# Altium PCB DC-DC Converter.PcbDoc (part 3 of 3)
Units mil, origin at the board's own origin, x right, y up, seen from the top; angles counter-clockwise.
Board outline 6692.91 x 3543.31 mil, 4 copper layers (Top Layer, GND, Power, Bottom Layer), stack 23.756 mil thick; 100 components, 76 nets, 345 pads, 803 vias.
Unrouted connection lines stored in the file: 1.
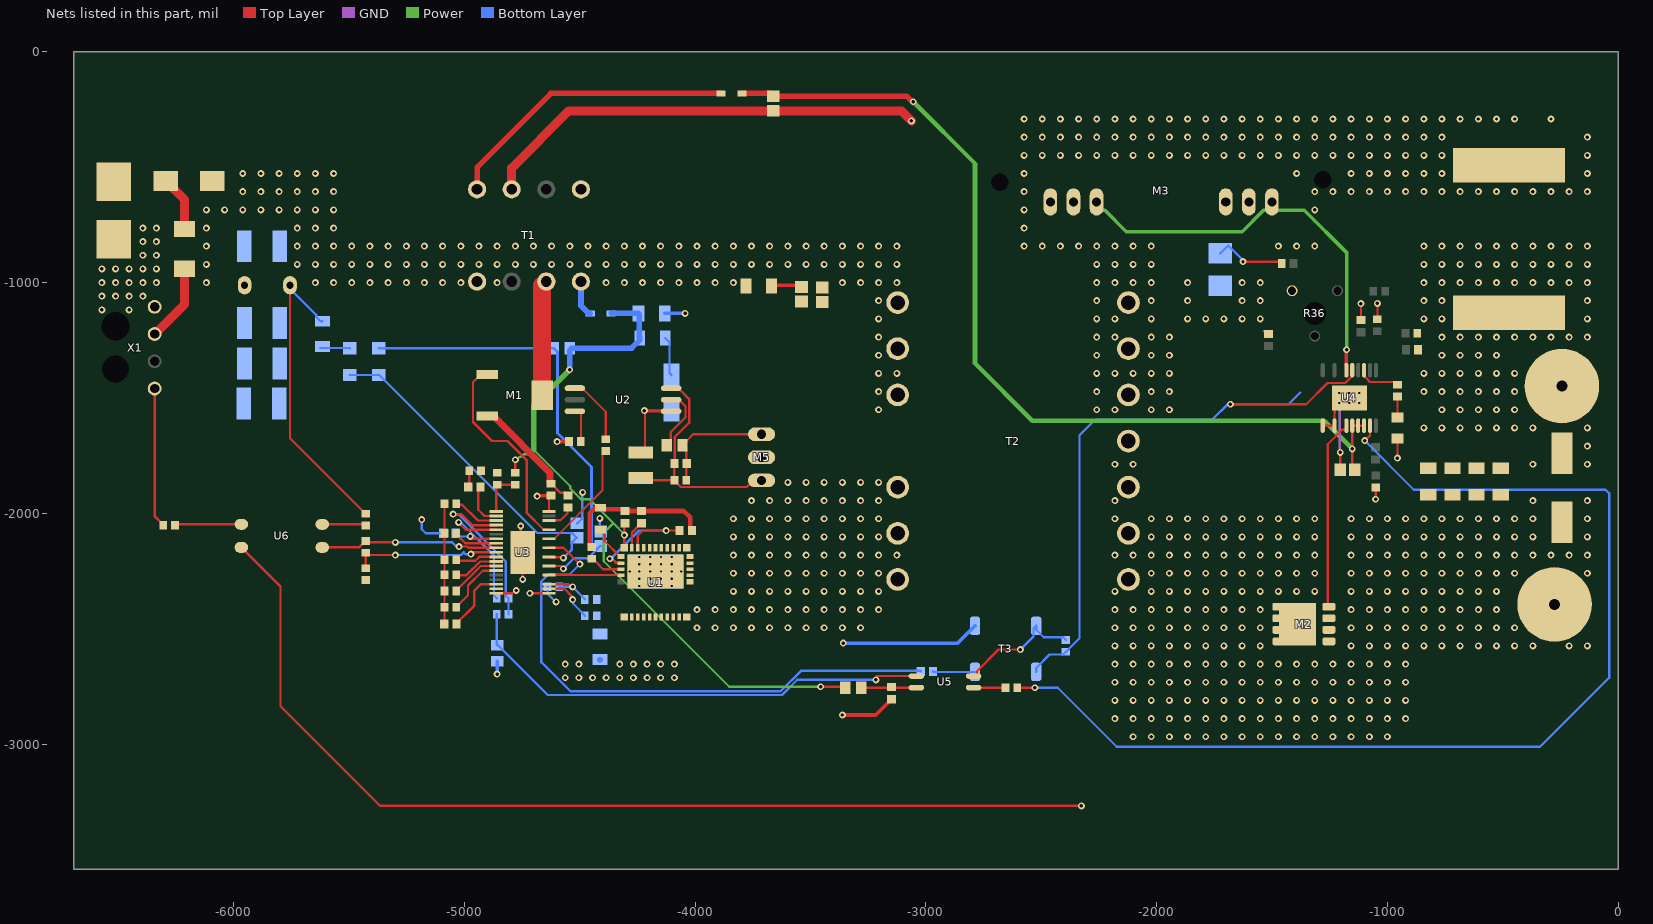
[diagram p4: the nets of this part, all layers, seen from the top]

## Via types
v1: diameter 30, hole 15, Top Layer to Bottom Layer, 791 vias
v2: diameter 19.68, hole 10, Top Layer to Bottom Layer, 6 vias
v3: diameter 196.85, hole 196.85, Top Layer to Bottom Layer, 4 vias
v4: diameter 47.24, hole 47.24, Top Layer to Bottom Layer, 2 vias

## Nets (pads, with @x,y where several pads share a name; then routed paths per layer and width w, separated by ;. In a path a pad name is that pad's centre, name@x,y a point inside that pad or via, vN(x,y) a via of type N, cw(c..) or ccw(c..) an arc to the next point about the centre after c; other vN are vias at no path point) (continued)
+12V_HC_HV: C2.2 C10.2 D2.1 R6.2 R11.1 R16.1 R41.2 U1.27 | length 3320.8
  Top Layer w10: R11.1@-4779.53,-1824.8 v1(-4779.53,-1767.8) ; U1.27@-4307.72,-2149.76 -4307.09,-2149.12 -4307.09,-2047.08 C10.2@-4303.32,-2043.31 ; v1(-3456.69,-2751.55) -3353.35,-2751.55 R41.2@-3349.41,-2755.48
  Power w10: v1(-4779.53,-1767.8) -4774.12,-1767.8 -4762.16,-1755.85 -4755.76,-1755.85 -4744.11,-1744.19 -4719.58,-1744.19 -4699.8,-1724.41 -4541.87,-1882.34 -4541.87,-1892.54 -4495.01,-1939.4 -4458.24,-1939.4 -4354.33,-2043.31 -4307.09,-2090.55 v1(-4307.09,-2094.49) ; -4357.76,-2046.73 -4396.07,-2085.05 -4396.07,-2207.62 -3852.14,-2751.55 v1(-3456.69,-2751.55)
  Power w23.62: -4699.8,-1724.41 -4699.8,-1533.46 v1(-4544.29,-1377.95)
  Bottom Layer w23.62: v1(-4544.29,-1377.95) -4544.29,-1294.29 -4534.45,-1284.45 -4275.59,-1284.45 -4240.16,-1249.02 R6.2@-4240.16,-1240.16 -4243.11,-1237.2 -4243.11,-1136.81 C2.2@-4246.06,-1133.86 D2.1@-4364.17,-1133.86
+12V_HC_LV: C1.2 C21.2 D1.1 U4.6 U4.7 U4.8 | length 4042.2
  Top Layer w10: C21.2@-1141.73,-1811.02 -1152.56,-1800.2 v1(-1152.56,-1720.47) U4.6@-1152.56,-1620.08 U4.7@-1126.97,-1620.08 U4.8@-1101.38,-1620.08
  Top Layer w23.62: D1.1@-3797.24,-180.31 -3674.02,-180.31 C1.2@-3661.42,-192.91 -3082.68,-192.91 -3055.12,-220.47 v1(-3055.12,-216.54)
  Power w19.68: v1(-3055.12,-216.54) -2787.4,-484.25 -2787.4,-1350.39 -2539.37,-1598.43 -1274.61,-1598.43 v1(-1152.56,-1720.47)
+14V_OUT: C5.1 C6.2 C7.2 C8.2 C9.2 C20.2 L2.2@-472.44,-1130.81 R34.2 X2.1
  other v1: -370.07,-1787.4 -133.85,-1787.4 -133.85,-1708.66 -842.52,-1629.92 -763.78,-1629.92 -685.04,-1629.92 -606.3,-1629.92 -527.56,-1629.92 -448.82,-1629.92 -370.07,-1629.92 -133.85,-1629.92 -763.78,-1551.18 -685.04,-1551.18 -606.3,-1551.18 -527.56,-1551.18 -448.82,-1551.18 -842.52,-1472.44 -763.78,-1472.44 -685.04,-1472.44 -606.3,-1472.44 -527.56,-1472.44 -448.82,-1472.44 -842.52,-1393.7 -763.78,-1393.7 -685.04,-1393.7 -606.3,-1393.7 -527.56,-1393.7 -448.82,-1393.7 -763.78,-1314.96 -685.04,-1314.96 -606.3,-1314.96 -527.56,-1314.96 -763.78,-1236.22 -685.04,-1236.22 -606.3,-1236.22 -527.56,-1236.22 -448.82,-1236.22 -370.07,-1236.22 -291.33,-1236.22 -212.59,-1236.22 -133.85,-1236.22 -842.52,-1157.48 -763.78,-1157.48 -133.85,-1157.48 -842.52,-1078.74 -763.78,-1078.74 -133.85,-1078.74 -842.52,-1000 -763.78,-1000 -685.04,-1000 -606.3,-1000 -527.56,-1000 -448.82,-1000 -370.07,-1000 -291.33,-1000 -212.59,-1000 -133.85,-1000 -842.52,-921.26 -763.78,-921.26 -685.04,-921.26 -606.3,-921.26 -527.56,-921.26 -448.82,-921.26 -370.07,-921.26 -291.33,-921.26 -212.59,-921.26 -133.85,-921.26 -842.52,-842.52 -763.78,-842.52 -685.04,-842.52 -606.3,-842.52 -527.56,-842.52 -448.82,-842.52 -370.07,-842.52 -291.33,-842.52 -212.59,-842.52 -133.85,-842.52
  other v4: -244.09,-1448.57
AGND: C18.1 C19.1 R12.1 R13.2 R24.1 R26.1 R27.1 R28.1 R29.1 R30.1 R31.1 U3.18 | length 663.1
  Top Layer w10: C19.1@-5087.6,-2478.85 -5086.61,-2477.86 R28.1@-5086.61,-2407.82 R31.1@-5086.61,-2336.78 R30.1@-5086.61,-2265.75 R29.1@-5086.61,-2200.79 R27.1@-5086.61,-2086.61 R26.1@-5086.61,-1958.33
  Bottom Layer w10: v1(-5185.11,-2027.56) -5185.11,-2068.72 -5167.21,-2086.61 C18.1@-5091.54,-2086.61
Aux_Pri_Dot: M1.2 T1.3 | length 499.6
  Top Layer w78.74: M1.2@-4663.28,-1488.19 -4663.28,-1014.07 T1.3@-4645.28,-996.06
Aux_Sec_HV_Dot: D2.2 T1.4 | length 158.6
  Bottom Layer w25: T1.4@-4495.28,-996.06 -4495.28,-1100.2 -4461.61,-1133.86 D2.2@-4454.72,-1133.86
Aux_Sec_LV__Dot: D1.2 T1.8 | length 1285.7
  Top Layer w23.62: T1.8@-4945.28,-596.06 -4945.28,-500.39 -4625.2,-180.31 D1.2@-3887.8,-180.31
BBSW: L2.2@-4410.43,-2070.87 U1.28 | length 159.5
  Top Layer w10: L2.2@-4410.43,-2070.87 -4403.54,-2070.87 -4391.81,-2082.6 -4391.81,-2120.79 -4325.42,-2187.18 U1.28@-4321.5,-2187.17
Cch_Drain_CSW: L2.1@-472.44,-491.24 M3.2 M3.5 T2.11 T2.12 T2.13
  other v1: -2259.84,-1551.18 -2181.1,-1551.18 -2023.62,-1551.18 -1944.88,-1551.18 -2259.84,-1472.44 -2023.62,-1472.44 -1944.88,-1472.44 -2259.84,-1393.7 -2181.1,-1393.7 -2102.36,-1393.7 -2023.62,-1393.7 -1944.88,-1393.7 -2259.84,-1314.96 -2023.62,-1314.96 -1944.88,-1314.96 -2259.84,-1236.22 -2181.1,-1236.22 -2023.62,-1236.22 -1944.88,-1236.22 -2259.84,-1157.48 -2181.1,-1157.48 -2023.62,-1157.48 -2259.84,-1078.74 -2023.62,-1078.74 -2259.84,-1000 -2181.1,-1000 -2102.36,-1000 -2023.62,-1000 -2259.84,-921.26 -2181.1,-921.26 -2102.36,-921.26 -2023.62,-921.26 -2574.8,-842.52 -2496.06,-842.52 -2417.32,-842.52 -2338.58,-842.52 -2259.84,-842.52 -2181.1,-842.52 -2102.36,-842.52 -2023.62,-842.52 -1472.44,-842.52 -1393.7,-842.52 -1314.96,-842.52 -2574.8,-763.78 -2574.8,-685.04 -1314.96,-685.04 -2574.8,-606.3 -1314.96,-606.3 -1236.22,-606.3 -1157.48,-606.3 -1078.74,-606.3 -1000,-606.3 -921.26,-606.3 -842.52,-606.3 -763.78,-606.3 -685.04,-606.3 -606.3,-606.3 -527.56,-606.3 -448.82,-606.3 -370.07,-606.3 -291.33,-606.3 -212.59,-606.3 -133.85,-606.3 -2574.8,-527.56 -1393.7,-527.56 -1157.48,-527.56 -1078.74,-527.56 -1000,-527.56 -921.26,-527.56 -842.52,-527.56 -763.78,-527.56 -133.85,-527.56 -2574.8,-448.82 -2496.06,-448.82 -2417.32,-448.82 -2338.58,-448.82 -2259.84,-448.82 -2181.1,-448.82 -2102.36,-448.82 -2023.62,-448.82 -1944.88,-448.82 -1866.14,-448.82 -1787.4,-448.82 -1708.66,-448.82 -1629.92,-448.82 -1551.18,-448.82 -1472.44,-448.82 -1393.7,-448.82 -1314.96,-448.82 -1236.22,-448.82 -1157.48,-448.82 -1078.74,-448.82 -1000,-448.82 -921.26,-448.82 -842.52,-448.82 -763.78,-448.82 -133.85,-448.82 -2574.8,-370.08 -2496.06,-370.08 -2417.32,-370.08 -2338.58,-370.08 -2259.84,-370.08 -2181.1,-370.08 -2102.36,-370.08 -2023.62,-370.08 -1944.88,-370.08 -1866.14,-370.08 -1787.4,-370.08 -1708.66,-370.08 -1629.92,-370.08 -1551.18,-370.08 -1472.44,-370.08 -1393.7,-370.08 -1314.96,-370.08 -1236.22,-370.08 -1157.48,-370.08 -1078.74,-370.08 -1000,-370.08 -921.26,-370.08 -842.52,-370.08 -763.78,-370.08 -133.85,-370.08 -2574.8,-291.34 -2496.06,-291.34 -2417.32,-291.34 -2338.58,-291.34 -2259.84,-291.34 -2181.1,-291.34 -2102.36,-291.34 -2023.62,-291.34 -1944.88,-291.34 -1866.14,-291.34 -1787.4,-291.34 -1708.66,-291.34 -1629.92,-291.34 -1551.18,-291.34 -1472.44,-291.34 -1393.7,-291.34 -1314.96,-291.34 -1236.22,-291.34 -1157.48,-291.34 -1078.74,-291.34 -1000,-291.34 -921.26,-291.34 -842.52,-291.34 -763.78,-291.34 -685.04,-291.34 -606.3,-291.34 -527.56,-291.34 -448.82,-291.34 -291.33,-291.34
Cch_Drive: M3.1 M3.4 U4.16 | length 1783
  Top Layer w15.75: U4.16@-1178.23,-1360.24 v1@-1178.23,-1292.4
  Top Layer w23.62: v1@-1178.23,-1292.4 v1(-1177.17,-1291.34)
  Power w15.75: M3.4@-2260.79,-650.61 -2260.79,-667.16 -2240.78,-687.16 -2224.48,-687.16 -2132.12,-779.53 -1629.46,-779.53 -1537.09,-687.16 -1517.16,-687.16 M3.1@-1500.79,-670.8 ; M3.1@-1500.79,-650.61 -1500.79,-667.16 -1480.78,-687.16 -1360.08,-687.16 -1177.17,-870.08 v1(-1177.17,-1291.34)
Cch_Gate: C13.2 M5.1 R7.2 R8.2 | length 530.2
  Top Layer w10: R7.2@-4056.1,-1716.54 R7.2@-4056.1,-1712.6 ; R8.2@-4038.96,-1856.3 -4038.96,-1786 C13.2@-4036.42,-1783.46 -4038.46,-1781.42 -4038.46,-1722.19 -4056.1,-1704.56 -4056.1,-1700.62 -4038.46,-1682.98 -4034.53,-1682.98 -4009.03,-1657.48 M5.1@-3712.6,-1657.48
Cch_I_Sense: M3.3 M3.6 R3.2 R33.2 | length 315.6
  Top Layer w10: v1(-1625.98,-909.45) -1466.54,-909.45 R33.2@-1458.66,-917.32
  Bottom Layer w10: R3.2@-1724.41,-873.62 -1690.19,-839.4 -1625.98,-903.6 v1(-1625.98,-909.45)
Clp_Drain: C3.1 C4.1 M5.2
Clp_Gate: R9.1 U3.32 | length 496.3
  Top Layer w10: U3.32@-4633.86,-2110.24 -4611.22,-2110.24 -4401.5,-1900.51 -4401.5,-1742.05 -4389.76,-1730.32 R9.1@-4387.8,-1730.32
Comp: R22.1 U3.5 | length 579.9
  Top Layer w10: v1(-5025.59,-2039.37) -4994.09,-2070.87 U3.5@-4862.2,-2070.87
  Bottom Layer w10: v1(-5025.59,-2039.37) -5021.76,-2043.2 -5012,-2043.2 -4871.97,-2183.23 -4871.97,-2356.88 R22.1@-4860.24,-2368.61
CPC_CTRL+: R38.1 U6.1 | length 288.8
  Top Layer w10: R38.1@-6253.94,-2051.18 -6250.53,-2047.77 U6.1@-5966.54,-2047.77
FB: R22.2 R23.1 U3.4 | length 753.9
  Top Layer w10: v1(-5049.21,-2003.94) -5013,-2003.94 -4965.76,-2051.18 U3.4@-4862.2,-2051.18
  Bottom Layer w10: v1(-5049.21,-2003.94) -5045.39,-2007.76 -5021.84,-2007.76 -4820.79,-2208.82 -4820.79,-2356.88 R22.2@-4809.06,-2368.61 R23.1@-4809.06,-2437.99
Fwd_Drain_FSW: M2.5 M2.6 M2.7 M2.8 T2.7 T2.8 T2.9 T2.10
  other v1: -2102.36,-2968.5 -2023.62,-2968.5 -1944.88,-2968.5 -1866.14,-2968.5 -1787.4,-2968.5 -1708.66,-2968.5 -1629.92,-2968.5 -1551.18,-2968.5 -1472.44,-2968.5 -1393.7,-2968.5 -1314.96,-2968.5 -2181.1,-2889.76 -2102.36,-2889.76 -2023.62,-2889.76 -1944.88,-2889.76 -1866.14,-2889.76 -1787.4,-2889.76 -1708.66,-2889.76 -1629.92,-2889.76 -1551.18,-2889.76 -1472.44,-2889.76 -1393.7,-2889.76 -1314.96,-2889.76 -2181.1,-2811.02 -2102.36,-2811.02 -2023.62,-2811.02 -1944.88,-2811.02 -1866.14,-2811.02 -1787.4,-2811.02 -1708.66,-2811.02 -1629.92,-2811.02 -1551.18,-2811.02 -1472.44,-2811.02 -1393.7,-2811.02 -1314.96,-2811.02 -2181.1,-2732.28 -2102.36,-2732.28 -2023.62,-2732.28 -1944.88,-2732.28 -1866.14,-2732.28 -1787.4,-2732.28 -1708.66,-2732.28 -1629.92,-2732.28 -1551.18,-2732.28 -1472.44,-2732.28 -1393.7,-2732.28 -1314.96,-2732.28 -2181.1,-2653.54 -2102.36,-2653.54 -2023.62,-2653.54 -1944.88,-2653.54 -1866.14,-2653.54 -1787.4,-2653.54 -1708.66,-2653.54 -1629.92,-2653.54 -1551.18,-2653.54 -1472.44,-2653.54 -1393.7,-2653.54 -1314.96,-2653.54 -2181.1,-2574.8 -2102.36,-2574.8 -2023.62,-2574.8 -1944.88,-2574.8 -1866.14,-2574.8 -1787.4,-2574.8 -1708.66,-2574.8 -1629.92,-2574.8 -1551.18,-2574.8 -2181.1,-2496.06 -2102.36,-2496.06 -2023.62,-2496.06 -1944.88,-2496.06 -1866.14,-2496.06 -1787.4,-2496.06 -1708.66,-2496.06 -1629.92,-2496.06 -1551.18,-2496.06 -2181.1,-2417.32 -2102.36,-2417.32 -2023.62,-2417.32 -1944.88,-2417.32 -1866.14,-2417.32 -1787.4,-2417.32 -1708.66,-2417.32 -1629.92,-2417.32 -1551.18,-2417.32 -2181.1,-2338.58 -2023.62,-2338.58 -1944.88,-2338.58 -1866.14,-2338.58 -1787.4,-2338.58 -1708.66,-2338.58 -1629.92,-2338.58 -1551.18,-2338.58 -1472.44,-2338.58 -1393.7,-2338.58 -1314.96,-2338.58 -2023.62,-2259.84 -1944.88,-2259.84 -1866.14,-2259.84 -1787.4,-2259.84 -1708.66,-2259.84 -1629.92,-2259.84 -1551.18,-2259.84 -1472.44,-2259.84 -1393.7,-2259.84 -1314.96,-2259.84 -2181.1,-2181.1 -2102.36,-2181.1 -2023.62,-2181.1 -1944.88,-2181.1 -1866.14,-2181.1 -1787.4,-2181.1 -1708.66,-2181.1 -1629.92,-2181.1 -1551.18,-2181.1 -1472.44,-2181.1 -1393.7,-2181.1 -1314.96,-2181.1 -2023.62,-2102.36 -1944.88,-2102.36 -1866.14,-2102.36 -1787.4,-2102.36 -1708.66,-2102.36 -1629.92,-2102.36 -1551.18,-2102.36 -1472.44,-2102.36 -1393.7,-2102.36 -1314.96,-2102.36 -2181.1,-2023.62 -2023.62,-2023.62 -1944.88,-2023.62 -1866.14,-2023.62 -1787.4,-2023.62 -1708.66,-2023.62 -1629.92,-2023.62 -1551.18,-2023.62 -1472.44,-2023.62 -1393.7,-2023.62 -1314.96,-2023.62 -2181.1,-1944.88 -2181.1,-1787.4 -2102.36,-1787.4
Fwd_Drive: M2.4 U4.5 | length 837.5
  Top Layer w10: M2.4@-1267.93,-2406.47 -1258.61,-2406.47 -1258.61,-1700.54 -1196.15,-1638.08 -1181.71,-1638.08 -1178.15,-1634.51 U4.5@-1178.15,-1620.08
HCOMP: C15.1 U3.2 | length 181.7
  Top Layer w10: C15.1@-4930.29,-1886.76 -4930.29,-1889.88 -4939.88,-1899.48 -4939.88,-1984.58 -4912.97,-2011.5 U3.2@-4871.12,-2011.5
HCOMP_C: C15.2 R13.1 | length 72.7
  Top Layer w10: C15.2@-4983.44,-1886.76 -4983.44,-1886.66 -4979.33,-1882.56 R13.1@-4979.33,-1815.73
HFB: R11.2 R12.2 U3.1 | length 196.5
  Top Layer w10: U3.1@-4862.2,-1992.13 -4862.13,-1992.05 -4862.13,-1879.84 R12.2@-4858.27,-1875.98 R11.2@-4779.53,-1875.98
HISENSE: R14.1 U3.36 | length 121.3
  Top Layer w10: U3.36@-4633.86,-2031.5 -4632.95,-2030.59 -4583.83,-2030.59 -4553.15,-1999.91 -4553.15,-1974.41 R14.1@-4551.18,-1974.41
HV+: F1.1 X1.1
  other v1: -6570.87,-1118.11 -6452.76,-1118.11 -6570.87,-1059.06 -6511.81,-1059.06 -6452.76,-1059.06 -6393.7,-1059.06 -6570.87,-1000 -6511.81,-1000 -6452.76,-1000 -6393.7,-1000 -6334.65,-1000 -6570.87,-940.95 -6511.81,-940.95 -6452.76,-940.95 -6393.7,-940.95 -6334.65,-940.95 -6393.7,-881.89 -6334.65,-881.89 -6393.7,-822.84 -6334.65,-822.84 -6393.7,-763.78 -6334.65,-763.78
HV_IN: C3.2 C26.1 C27.2 C28.2 C29.2 C30.2 L1.2 R2.2 R15.2 R17.1 T1.1 T2.1 T2.2 T2.3 | length 1346.9
  Top Layer w10: C26.1@-5755.91,-1011.81 -5755.91,-1675.12 -5429.13,-2001.89 R17.1@-5427.17,-2001.89
  Bottom Layer w10: C26.1@-5755.91,-1011.81 -5752.35,-1015.37 -5752.35,-1030.33 -5642.44,-1140.24 -5642.44,-1149.09 -5623.82,-1167.72 R15.2@-5614.96,-1167.72
  other v1: -3204.72,-1551.18 -3204.72,-1472.44 -3204.72,-1393.7 -3125.98,-1393.7 -3204.72,-1314.96 -3204.72,-1236.22 -3204.72,-1157.48 -3204.72,-1078.74 -6118.11,-1000 -5645.67,-1000 -5566.93,-1000 -5488.19,-1000 -5409.45,-1000 -5330.71,-1000 -5251.97,-1000 -5173.23,-1000 -5094.49,-1000 -5015.75,-1000 -4858.27,-1000 -4385.83,-1000 -4307.08,-1000 -4228.34,-1000 -4149.6,-1000 -4070.86,-1000 -3992.12,-1000 -3913.38,-1000 -3834.64,-1000 -3362.2,-1000 -3283.46,-1000 -3204.72,-1000 -3125.98,-1000 -6118.11,-921.26 -5724.41,-921.26 -5645.67,-921.26 -5566.93,-921.26 -5488.19,-921.26 -5409.45,-921.26 -5330.71,-921.26 -5251.97,-921.26 -5173.23,-921.26 -5094.49,-921.26 -5015.75,-921.26 -4937.01,-921.26 -4858.27,-921.26 -4779.53,-921.26 -4700.79,-921.26 -4622.05,-921.26 -4543.31,-921.26 -4464.57,-921.26 -4385.83,-921.26 -4307.08,-921.26 -4228.34,-921.26 -4149.6,-921.26 -4070.86,-921.26 -3992.12,-921.26 -3913.38,-921.26 -3834.64,-921.26 -3755.9,-921.26 -3677.16,-921.26 -3598.42,-921.26 -3519.68,-921.26 -3440.94,-921.26 -3362.2,-921.26 -3283.46,-921.26 -3204.72,-921.26 -3125.98,-921.26 -6118.11,-842.52 -5724.41,-842.52 -5645.67,-842.52 -5566.93,-842.52 -5488.19,-842.52 -5409.45,-842.52 -5330.71,-842.52 -5251.97,-842.52 -5173.23,-842.52 -5094.49,-842.52 -5015.75,-842.52 -4937.01,-842.52 -4858.27,-842.52 -4779.53,-842.52 -4700.79,-842.52 -4622.05,-842.52 -4543.31,-842.52 -4464.57,-842.52 -4385.83,-842.52 -4307.08,-842.52 -4228.34,-842.52 -4149.6,-842.52 -4070.86,-842.52 -3992.12,-842.52 -3913.38,-842.52 -3834.64,-842.52 -3755.9,-842.52 -3677.16,-842.52 -3598.42,-842.52 -3519.68,-842.52 -3440.94,-842.52 -3362.2,-842.52 -3283.46,-842.52 -3204.72,-842.52 -3125.98,-842.52 -6118.11,-763.78 -5724.41,-763.78 -5645.67,-763.78 -5566.93,-763.78 -6118.11,-685.04 -6039.37,-685.04 -5960.63,-685.04 -5881.89,-685.04 -5803.15,-685.04 -5724.41,-685.04 -5645.67,-685.04 -5566.93,-685.04 -5960.63,-606.3 -5881.89,-606.3 -5803.15,-606.3 -5724.41,-606.3 -5645.67,-606.3 -5566.93,-606.3 -5960.63,-527.56 -5881.89,-527.56 -5803.15,-527.56 -5724.41,-527.56 -5645.67,-527.56 -5566.93,-527.56
HV_IN_R: R17.2 U6.4 | length 191.2
  Top Layer w10: U6.4@-5616.14,-2047.77 -5432.46,-2047.77 R17.2@-5427.17,-2053.07
HVGND: C2.1 C16.1 C17.1 C24.1 C26.2 C27.1 C28.1 C29.1 C30.1 D7.1 R1.1 R5.1 R10.1 R19.1 R25.1 T1.5 T3.3 U3.19 U3.20 U3.38 U3.39 X1.2 | length 2213.4
  Top Layer w10: U3.19@-4862.2,-2346.46 -4791.45,-2346.46 -4779.64,-2334.65 v1(-4775.59,-2334.65) ; v1(-4755.91,-2055.12) -4755.91,-2161.41 U3.39@-4748.03,-2169.29 -4748.03,-2286.05 v1(-4747.32,-2286.76) ; v1@-4716.54,-2346.46 U3.20@-4633.86,-2346.46 ; R1.1@-4633.86,-1931.8 U3.38@-4633.86,-1992.13 U3.38@-4632.95,-1991.22
  Top Layer w15.75: v1(-4685.04,-1925.2) -4683.91,-1924.07 -4626.13,-1924.07 R1.1@-4633.86,-1931.8 ; v1(-4598.43,-1688.98) R10.1@-4546.97,-1688.98 ; v1(-3362.2,-2874.02) -3217.52,-2874.02 C24.1@-3149.61,-2806.1
  Top Layer w39.37: X1.2@-6342.52,-1223.23 -6212.6,-1093.31 D7.1@-6212.6,-940.04
  Bottom Layer w10: R19.1@-4639.76,-2318.9 -4639.76,-2348.43 -4604.07,-2384.11 v1(-4602.36,-2384.11) ; C16.1@-4511.81,-2043.31 -4509.84,-2043.31 -4489.25,-2022.72 -4489.25,-1904.85 -4488.19,-1905.91 v1(-4488.19,-1909.45) ; v1(-4413.39,-2021.81) -4413.39,-2074.8 C17.1@-4409.45,-2078.74
  Bottom Layer w15.75: v1(-4858.27,-2696.85) R25.1@-4858.27,-2640.75 ; C2.1@-4131.89,-1133.86 v1(-4043.31,-1133.86) ; v1(-3358.27,-2562.99) -2862.85,-2562.99 T3.3@-2787.4,-2487.54
  Bottom Layer w23.62: R5.1@-4413.39,-2633.86 R5.1@-4411.58,-2633.86
  other v1: -4562.99,-2712.6 -4503.94,-2712.6 -4444.88,-2712.6 -4385.83,-2712.6 -4326.77,-2712.6 -4267.72,-2712.6 -4208.66,-2712.6 -4149.61,-2712.6 -4090.55,-2712.6 -4562.99,-2653.54 -4503.94,-2653.54 -4326.77,-2653.54 -4267.72,-2653.54 -4208.66,-2653.54 -4149.61,-2653.54 -4090.55,-2653.54 -4716.54,-2346.46
INTVCC: C17.2 D6.1 R16.2 U3.26 | length 1981.3
  Top Layer w10: U3.26@-4633.86,-2228.35 -4582.68,-2228.35 v1(-4570.87,-2240.16)
  Bottom Layer w10: v1(-4570.87,-2240.16) -4525.18,-2194.47 -4464.16,-2194.47 -4411.42,-2141.73 C17.2@-4409.45,-2141.73
  Bottom Layer w12: D6.1@-5371.18,-1284.45 R16.2@-4613.19,-1284.45 -4596.55,-1301.09 -4596.55,-1652.67 -4449.01,-1800.21 -4449.01,-2135.25 -4429.13,-2155.13 C17.2@-4429.13,-2161.42
ISENSEP: R20.1 U3.21 | length 240
  Top Layer w10: U3.21@-4633.86,-2326.77 -4566.93,-2326.77 -4531.5,-2362.2 v1(-4531.5,-2374.02)
  Bottom Layer w10: v1(-4531.5,-2374.02) -4531.5,-2367.42 -4528.89,-2364.81 -4528.89,-2392.2 -4478.35,-2442.75 R20.1@-4478.35,-2444.71
IVSEC: R27.2 U3.8 | length 193.4
  Top Layer w10: R27.2@-5035.43,-2086.61 -5023.7,-2098.35 -5023.7,-2102.21 -4996.61,-2129.29 -4862.83,-2129.29 U3.8@-4862.2,-2129.92
LVGND: C1.1 C5.2 C6.1 C7.1 C8.1 C9.1 C21.1 C23.2 D5.2 M2.1 M2.2 M2.3 R3.1 R32.2 R36.2 R39.1 R40.1 R43.1 T1.7 T3.4 U4.1 U4.3 U4.21 U5.2 U6.2 X3.1 | length 7707.4
  Top Layer w10: U6.2@-5966.54,-2147.77 -5797.24,-2317.06 -5797.24,-2836.61 -5366.14,-3267.72 v1(-2326.77,-3267.72) ; U5.2@-2793.47,-2705.48 -2785.31,-2705.48 -2779.02,-2699.19 -2779.02,-2684.53 -2685.04,-2590.55 v1(-2590.56,-2590.55) ; -1536.34,-1211.68 -1527.48,-1211.68 R32.2@-1515.75,-1223.42 ; U4.1@-1280.51,-1620.08 U4.3@-1229.33,-1620.08 -1229.33,-1563.98 -1228.43,-1563.08 -1228.43,-1548.94 -1179.5,-1500 U4.21@-1165.35,-1500 ; C21.1@-1204.72,-1811.02 v1(-1204.72,-1736.22) ; C23.2@-1114.99,-1161.97 v1(-1114.99,-1091.52) ; v1(-1051.35,-1938.98) -1051.18,-1938.98 R40.1@-1051.18,-1887.8 ; R39.1@-1043.96,-1159.45 -1043.31,-1158.8 v1(-1043.31,-1090.55) ; v1(-956.69,-1761.22) D5.2@-956.69,-1675.2
  Top Layer w39.37: T1.7@-4795.28,-596.06 -4795.28,-503.94 -4547.24,-255.91 C1.1@-3661.42,-255.91 -3106.3,-255.91 v1(-3062.99,-299.21)
  GND w10: v2(-1208.66,-1521.65) -1206.81,-1523.51 -1206.81,-1734.14 v1(-1204.72,-1736.22)
  Bottom Layer w10: v1(-2590.56,-2590.55) -2533.54,-2533.53 -2533.54,-2498.68 T3.4@-2522.4,-2487.54 -2522.4,-2505.04 -2489.96,-2537.48 -2405.43,-2537.48 R43.1@-2393.7,-2549.21
  other v1: -1236.22,-2968.5 -1157.48,-2968.5 -1078.74,-2968.5 -1000,-2968.5 -1236.22,-2889.76 -1157.48,-2889.76 -1078.74,-2889.76 -1000,-2889.76 -921.26,-2889.76 -1236.22,-2811.02 -1157.48,-2811.02 -1078.74,-2811.02 -1000,-2811.02 -921.26,-2811.02 -1236.22,-2732.28 -1157.48,-2732.28 -1078.74,-2732.28 -1000,-2732.28 -921.26,-2732.28 -1236.22,-2653.54 -1157.48,-2653.54 -1078.74,-2653.54 -1000,-2653.54 -921.26,-2653.54 -1157.48,-2574.8 -1078.74,-2574.8 -1000,-2574.8 -921.26,-2574.8 -842.52,-2574.8 -763.78,-2574.8 -685.04,-2574.8 -606.3,-2574.8 -527.56,-2574.8 -448.82,-2574.8 -370.07,-2574.8 -212.59,-2574.8 -133.85,-2574.8 -1157.48,-2496.06 -1078.74,-2496.06 -1000,-2496.06 -921.26,-2496.06 -842.52,-2496.06 -763.78,-2496.06 -685.04,-2496.06 -606.3,-2496.06 -527.56,-2496.06 -448.82,-2496.06 -1157.48,-2417.32 -1078.74,-2417.32 -1000,-2417.32 -921.26,-2417.32 -842.52,-2417.32 -763.78,-2417.32 -685.04,-2417.32 -606.3,-2417.32 -527.56,-2417.32 -1157.48,-2338.58 -1078.74,-2338.58 -1000,-2338.58 -921.26,-2338.58 -842.52,-2338.58 -763.78,-2338.58 -685.04,-2338.58 -606.3,-2338.58 -527.56,-2338.58 -1157.48,-2259.84 -1078.74,-2259.84 -1000,-2259.84 -921.26,-2259.84 -842.52,-2259.84 -763.78,-2259.84 -685.04,-2259.84 -606.3,-2259.84 -527.56,-2259.84 -448.82,-2259.84 -133.85,-2259.84 -1157.48,-2181.1 -1078.74,-2181.1 -1000,-2181.1 -921.26,-2181.1 -842.52,-2181.1 -763.78,-2181.1 -685.04,-2181.1 -606.3,-2181.1 -527.56,-2181.1 -448.82,-2181.1 -370.07,-2181.1 -291.33,-2181.1 -212.59,-2181.1 -133.85,-2181.1 -1157.48,-2102.36 -1078.74,-2102.36 -1000,-2102.36 -921.26,-2102.36 -842.52,-2102.36 -763.78,-2102.36 -685.04,-2102.36 -606.3,-2102.36 -527.56,-2102.36 -448.82,-2102.36 -370.07,-2102.36 -133.85,-2102.36 -1157.48,-2023.62 -1078.74,-2023.62 -1000,-2023.62 -921.26,-2023.62 -842.52,-2023.62 -763.78,-2023.62 -685.04,-2023.62 -606.3,-2023.62 -527.56,-2023.62 -448.82,-2023.62 -370.07,-2023.62 -133.85,-2023.62 -370.07,-1944.88 -133.85,-1944.88 -1866.14,-1157.48 -1787.4,-1157.48 -1708.66,-1157.48 -1629.92,-1157.48 -1551.18,-1157.48 -1866.14,-1078.74 -1629.92,-1078.74 -1551.18,-1078.74 -1866.14,-1000 -1629.92,-1000 -1551.18,-1000
  other v2: -1165.35,-1521.65 -1122.05,-1521.65 -1208.66,-1478.35 -1165.35,-1478.35 -1122.05,-1478.35
  other v4: -275.59,-2394.69
OC: R18.1 R19.2 U3.22 | length 241.3
  Top Layer w10: U3.22@-4633.86,-2307.09 -4548.72,-2307.09 -4536.91,-2318.9 v1(-4531.5,-2318.9)
  Bottom Layer w10: R19.2@-4588.58,-2318.9 v1(-4531.5,-2318.9) -4510.28,-2340.11 -4509.95,-2340.11 -4478.35,-2371.71 R18.1@-4478.35,-2373.68
OPTO_A: R42.2 U5.1 | length 138.1
  Top Layer w10: U5.1@-2793.47,-2755.48 -2655.94,-2755.48 R42.2@-2655.51,-2755.91
OPTO_C: C24.2 R41.1 U5.4 | length 240.1
  Top Layer w10: R41.1@-3280.51,-2755.48 C24.2@-3149.61,-2755.48 ; C24.2@-3149.61,-2752.95 -3147.08,-2755.48 U5.4@-3041.51,-2755.48
Opto_In: R23.2 R25.2 U5.3 | length 2083.6
  Top Layer w10: v1(-3216.54,-2721.62) -3216.54,-2715.06 -3219,-2712.6 -3211.88,-2705.48 U5.3@-3041.51,-2705.48
  Bottom Layer w10: R23.2@-4860.24,-2437.99 -4860.24,-2569.88 R25.2@-4858.27,-2571.85 -4854.33,-2571.85 -4638.53,-2787.65 -3623.29,-2787.65 -3557.26,-2721.62 v1(-3216.54,-2721.62)
OPTO_OUT: R42.1 U4.9 | length 4822.1
  Top Layer w10: R42.1@-2604.33,-2755.91 v1(-2527.56,-2755.91) ; v1(-1098.43,-1685.04) -1075.79,-1662.4 U4.9@-1075.79,-1620.08
  Bottom Layer w10: v1(-2527.56,-2755.91) -2429.13,-2755.91 -2173.23,-3011.81 -338.58,-3011.81 -39.37,-2712.6 -39.37,-1913.39 -55.12,-1897.64 -885.83,-1897.64 v1(-1098.43,-1685.04)
OVLO: R21.1 R24.2 U3.10 | length 655.4
  Top Layer w10: R24.2@-5427.17,-2238.11 R21.1@-5427.17,-2171.18 -5417.24,-2181.1 v1(-5299.21,-2181.1) ; v1(-4972.44,-2177.17) -4972.44,-2169.29 -4968.39,-2173.34 -4963.2,-2173.34 -4959.15,-2169.29 U3.10@-4862.2,-2169.29
  Bottom Layer w10: v1(-5299.21,-2181.1) -5015.26,-2181.1 -5003.45,-2169.29 -4995.58,-2177.17 v1(-4972.44,-2177.17)
P\G\O\O\D\: R37.2 U4.13 | length 185.5
  Top Layer w10: U4.13@-1101.38,-1379.92 -1101.38,-1404.65 -1095.65,-1410.38 -1095.65,-1410.78 -1075.25,-1431.18 -968.43,-1431.18 R37.2@-956.69,-1442.91
P\G\O\O\D_R: D5.1 R37.1 | length 90.6
  Top Layer w10: D5.1@-956.69,-1584.65 R37.1@-956.69,-1494.09
PP5V0_L: C11.2 U1.25 U1.29 | length 596
  Top Layer w10: v1(-4370.07,-2196.85) -4363.38,-2196.85 -4362.06,-2195.52 -4343.76,-2213.82 -4324.4,-2213.82 U1.29@-4321.5,-2216.69 ; U1.25@-4248.68,-2149.77 -4248.68,-2096.2 -4227.28,-2074.8 v1(-4125.98,-2074.8) C11.2@-4067.66,-2074.8
  Bottom Layer w10: v1(-4370.07,-2196.85) -4366.14,-2196.85 -4364.81,-2195.52 -4244.09,-2074.8 v1(-4125.98,-2074.8)
Pri_Current_Sense: C10.1 C11.1 C12.2 L2.1@-4410.43,-1976.38 R4.1 R5.2 R18.2 R20.2 U1.12 U1.13 U1.14 U1.15 U1.16 U1.17 U1.18 U1.19 U1.20 U1.21 U1.22 U1.23 U1.24 U1.33 | length 671.8
  Top Layer w20: R4.1@-4448.82,-2145.92 -4449.96,-2145.92 -4456.69,-2139.18 -4456.69,-2000 -4433.07,-1976.38 L2.1@-4410.43,-1976.38 -4403.7,-1983.11 -4310.36,-1983.11 C10.1@-4303.32,-1990.16 C12.2@-4232.28,-1990.16 -4049.21,-1990.16 -4022.22,-2017.15 -4022.22,-2067.09 C11.1@-4014.51,-2074.8
Pri_Drain_SWP: C13.1 C14.1 M5.3 R8.1 T2.4 T2.5 T2.6 U1.1 U1.2 U1.3 U1.4 U1.5 U1.6 U1.7 U1.8 U1.9 U1.10 U1.11 U2.6 | length 1028.5
  Top Layer w10: C14.1@-4236.22,-1846.46 -4226.38,-1856.3 R8.1@-4090.14,-1856.3 ; U2.6@-4104.06,-1457.87 -4072.56,-1457.87 -4026.33,-1504.1 -4026.33,-1607.42 -4088.59,-1669.68 -4088.59,-1782.49 -4090.14,-1784.04 R8.1@-4090.14,-1856.3 ; M5.3@-3712.6,-1857.48 -3748.06,-1857.48 -3776.58,-1886 -4062.41,-1886 -4090.14,-1858.27 R8.1@-4090.14,-1856.3
  other v1: -3992.12,-2496.06 -3913.38,-2496.06 -3834.64,-2496.06 -3755.9,-2496.06 -3677.16,-2496.06 -3598.42,-2496.06 -3519.68,-2496.06 -3440.94,-2496.06 -3362.2,-2496.06 -3283.46,-2496.06 -3992.12,-2417.32 -3913.38,-2417.32 -3834.64,-2417.32 -3755.9,-2417.32 -3677.16,-2417.32 -3598.42,-2417.32 -3519.68,-2417.32 -3440.94,-2417.32 -3362.2,-2417.32 -3283.46,-2417.32 -3204.72,-2417.32 -3834.64,-2338.58 -3755.9,-2338.58 -3677.16,-2338.58 -3598.42,-2338.58 -3519.68,-2338.58 -3440.94,-2338.58 -3362.2,-2338.58 -3283.46,-2338.58 -3204.72,-2338.58 -3834.64,-2259.84 -3755.9,-2259.84 -3677.16,-2259.84 -3598.42,-2259.84 -3519.68,-2259.84 -3440.94,-2259.84 -3362.2,-2259.84 -3283.46,-2259.84 -3204.72,-2259.84 -3834.64,-2181.1 -3755.9,-2181.1 -3677.16,-2181.1 -3598.42,-2181.1 -3519.68,-2181.1 -3440.94,-2181.1 -3362.2,-2181.1 -3283.46,-2181.1 -3204.72,-2181.1 -3125.98,-2181.1 -3834.64,-2102.36 -3755.9,-2102.36 -3677.16,-2102.36 -3598.42,-2102.36 -3519.68,-2102.36 -3440.94,-2102.36 -3362.2,-2102.36 -3283.46,-2102.36 -3204.72,-2102.36 -3834.64,-2023.62 -3755.9,-2023.62 -3677.16,-2023.62 -3598.42,-2023.62 -3519.68,-2023.62 -3440.94,-2023.62 -3362.2,-2023.62 -3283.46,-2023.62 -3204.72,-2023.62 -3755.9,-1944.88 -3677.16,-1944.88 -3598.42,-1944.88 -3519.68,-1944.88 -3440.94,-1944.88 -3362.2,-1944.88 -3283.46,-1944.88 -3204.72,-1944.88 -3598.42,-1866.14 -3519.68,-1866.14 -3440.94,-1866.14 -3362.2,-1866.14 -3283.46,-1866.14 -3204.72,-1866.14
Pri_Gate: U1.31 U3.24 | length 316.1
  Top Layer w10: U3.24@-4632.95,-2266.81 U3.24@-4633.86,-2267.72 -4633.77,-2267.8 -4327.33,-2267.8 -4324.38,-2270.75 U1.31@-4321.5,-2267.87
Q2_D: M1.3 R1.2 R14.2 | length 519.4
  Top Layer w10: R1.2@-4625,-1871.76 -4623.03,-1871.76 -4583.29,-1911.5 -4562.91,-1911.5 R14.2@-4551.18,-1923.23
  Top Layer w29.53: M1.3@-4901.47,-1578.74 -4874.89,-1578.74 -4628.94,-1824.7 -4628.94,-1869.79 -4626.97,-1871.76 R1.2@-4625,-1871.76
Q2_G: M1.1 U3.34 | length 903
  Top Layer w10: M1.1@-4901.47,-1397.64 -4928.04,-1397.64 -4962.73,-1432.32 -4962.73,-1604.64 -4880.27,-1687.09 -4813.07,-1687.09 -4730.61,-1769.55 -4730.61,-1996.75 -4656.5,-2070.87 U3.34@-4633.86,-2070.87
RDRV: R4.2 U1.30 | length 147.2
  Top Layer w10: R4.2@-4448.82,-2197.1 -4442.91,-2197.1 -4415.44,-2224.57 -4415.44,-2226.54 -4399.7,-2242.28 U1.30@-4321.5,-2242.28
RT: R26.2 U3.3 | length 204.7
  Top Layer w10: R26.2@-5035.43,-1958.33 -5035.43,-1960.29 -5032.21,-1963.52 -5009.56,-1963.52 -4941.58,-2031.5 U3.3@-4862.2,-2031.5
SNUB_RC: C4.2 R2.1 | length 142.2
  Top Layer w10: R2.1@-3669.29,-1015.75 R2.1@-3669.29,-1006.89
  Top Layer w15.75: R2.1@-3669.29,-1011.32 -3547.74,-1011.32 C4.2@-3539.37,-1019.69
SS1: C18.2 U3.7 | length 192.5
  Top Layer w10: v1(-4974.9,-2100.29) -4974.9,-2110.24 U3.7@-4862.2,-2110.24
  Bottom Layer w10: C18.2@-5038.39,-2086.61 -5038.39,-2087.68 -5025.67,-2100.39 -5025.57,-2100.29 v1(-4974.9,-2100.29)
SS2: C19.2 U3.17 | length 282.3
  Top Layer w10: C19.2@-5034.45,-2478.85 -5034.45,-2476.88 -4956.87,-2399.31 -4956.87,-2334.83 -4930.04,-2307.99 -4863.11,-2307.99 U3.17@-4862.2,-2307.09
SSR_ENABLE: R38.2 X1.4 | length 626.8
  Top Layer w10: X1.4@-6342.52,-1459.45 -6342.52,-2011.81 R38.2@-6305.12,-2049.21 ; R38.2@-6318.82,-2037.48 -6316.85,-2037.48 R38.2@-6305.12,-2049.21 ; R38.2@-6305.12,-2051.18 R38.2@-6305.12,-2049.21 ; R38.2@-6305.12,-2050.2 R38.2@-6305.12,-2049.21
Sync_HV_Dot: C25.2 T3.1 | length 183.1
  Bottom Layer w10: C25.2@-2969.49,-2685.04 -2966.98,-2687.54 T3.1@-2787.4,-2687.54
SYNC_IN: C25.1 U3.30 | length 2446.1
  Top Layer w10: U3.30@-4633.86,-2149.61 -4570.87,-2149.61 v1(-4500,-2220.47)
  Bottom Layer w10: v1(-4500,-2220.47) -4545.69,-2266.16 -4638.01,-2266.16 -4667.5,-2295.64 -4667.5,-2644.87 -4540.71,-2771.65 -3629.92,-2771.65 -3541.19,-2682.92 -3024.75,-2682.92 C25.1@-3022.64,-2685.04
SYNC_OUT: R43.2 T3.6 U4.15 | length 2771.3
  Top Layer w10: v1(-1681.1,-1527.56) -1352.1,-1527.56 -1259.6,-1435.06 -1182.57,-1435.06 -1158.29,-1410.78 -1158.29,-1410.38 -1152.56,-1404.65 U4.15@-1152.56,-1379.92
  Bottom Layer w10: T3.6@-2522.4,-2687.54 -2522.4,-2670.04 -2464.48,-2612.13 -2405.43,-2612.13 R43.2@-2393.7,-2600.39 -2391.73,-2600.39 -2380,-2588.66 -2380,-2586.69 -2334.65,-2541.34 -2334.65,-1661.42 -2267.72,-1594.49 -1759.84,-1594.49 v1@-1688.98,-1523.62 ; v1(-1681.1,-1527.56) -1429.13,-1527.56 -1377.84,-1476.27
TAO: R29.2 U3.11 | length 191.4
  Top Layer w10: R29.2@-5028.94,-2194.29 R29.2@-5035.43,-2200.79 -5030.43,-2205.79 -4952.76,-2205.79 -4935.94,-2188.98 U3.11@-4862.2,-2188.98
TAS: R30.2 U3.12 | length 200.6
  Top Layer w10: R30.2@-5035.43,-2263.78 R30.2@-5035.43,-2265.75 -5033.34,-2267.84 -4991.09,-2267.84 -4931.91,-2208.66 U3.12@-4862.2,-2208.66
TBLNK: R28.2 U3.14 | length 265.2
  Top Layer w10: R28.2@-5035.43,-2407.82 -5035.43,-2405.85 -4984.74,-2355.15 -4984.74,-2313.09 -4920.59,-2248.94 -4863.11,-2248.94 U3.14@-4862.2,-2248.03
TOS: R31.2 U3.13 | length 219.3
  Top Layer w10: R31.2@-5035.43,-2336.78 -5035.43,-2334.81 -4928.97,-2228.35 U3.13@-4862.2,-2228.35
UVLO_Vsec: R21.2 U3.9 U6.3 | length 781
  Top Layer w10: U6.3@-5616.14,-2147.77 -5456.91,-2147.77 -5429.13,-2120 R21.2@-5427.17,-2120 -5421.18,-2125.98 v1(-5299.21,-2125.98) ; v1(-5023.63,-2144.29) -4987.68,-2144.29 -4982.37,-2149.61 U3.9@-4862.2,-2149.61
  Bottom Layer w10: v1(-5299.21,-2125.98) -5052.66,-2125.98 -5032.97,-2145.67 -5029.04,-2141.74 -5026.48,-2144.29 v1(-5023.63,-2144.29)
VIN: C16.2 D4.2 D6.2 U3.28 | length 1450.6
  Top Layer w10: U3.28@-4633.86,-2188.98 -4632.95,-2189.88 -4573.9,-2189.88 v1(-4570.87,-2192.91)
  Bottom Layer w10: D4.2@-5497.17,-1400.59 -5369.21,-1400.59 -4684.09,-2085.71 -4534.37,-2085.71 -4513.78,-2106.3 -4534.37,-2126.89 -4534.37,-2156.42 v1(-4570.87,-2192.91)
VIN_F: D7.2 F1.2 L1.1 | length 247.4
  Top Layer w39.37: L1.1@-6293.7,-560.63 -6283.86,-560.63 -6260.24,-584.25 -6260.24,-594.09 -6212.6,-641.73 D7.2@-6212.6,-768.62
VIN_R: D4.1 R15.1 | length 129.2
  Bottom Layer w10: R15.1@-5625.98,-1283.46 -5498.15,-1283.46 D4.1@-5497.17,-1284.45
VNEG: C12.1 U1.26 | length 125
  Top Layer w10: U1.26@-4274.25,-2149.75 -4274.25,-2083.31 -4234.25,-2043.31 C12.1@-4232.28,-2043.31
W346_A: R9.2 U2.1 | length 295
  Top Layer w10: U2.1@-4521.38,-1457.87 -4489.88,-1457.87 -4387.8,-1559.96 R9.2@-4387.8,-1679.13
W346_C: R10.2 U2.3 | length 153.8
  Top Layer w10: U2.3@-4521.38,-1557.87 -4502.08,-1557.87 -4494.88,-1565.08 -4494.88,-1688.07 R10.2@-4495.79,-1688.98
W346_Charge: D3.1 R6.1 | length 172.6
  Bottom Layer w10: R6.1@-4129.92,-1240.16 -4111.3,-1258.78 -4111.3,-1392.44 D3.1@-4102.36,-1401.38
W346_OUT: R7.1 U2.5 | length 275.7
  Top Layer w10: R7.1@-4123.85,-1704.56 -4106.21,-1686.92 -4106.21,-1647.65 -4042.33,-1583.77 -4042.33,-1536.07 -4070.53,-1507.87 U2.5@-4104.06,-1507.87
W346_VCC: C14.2 D3.2 U2.4 | length 446.9
  Top Layer w10: C14.2@-4236.22,-1736.22 -4208.66,-1736.22 -4217.72,-1727.17 v1@-4217.72,-1557.87 ; v1(-4220.47,-1555.12) v1@-4217.72,-1557.87 ; U2.4@-4104.06,-1557.87 v1@-4217.72,-1557.87
  Bottom Layer w10: v1(-4220.47,-1555.12) -4106.1,-1555.12 D3.2@-4102.36,-1551.38
pads on no net: M3.0 R36.0 R36.3 T1.2 T1.6 U1.32 U2.2 U3.6 U3.15 U3.16 U3.37 X1.3 X1.5
copper on no net:
  other v3: -354.33,-3228.35 -6377.95,-3188.98 -6299.21,-236.22 -196.85,-196.85

## Polygon pours and split planes (outlines as drawn)
LVGND on GND "LVGND" (solid, shelved, pour order 2): 0,0 -3307.09,0 -3307.09,-3562.99 0,-3562.99
HVGND on GND "HVGND" (solid, shelved, pour order 0): -6692.91,-3543.31 -6692.91,0 -3291.34,0 -3291.34,-3543.31
Pri_Current_Sense on Top Layer "Top Layer-Pri_Current_Sense" (solid, pour order 48): -4294.84,-2175.59 -4294.84,-2324.8 -4007.44,-2324.8 -3979.88,-2297.24 -3979.88,-2032.59 -4012.9,-2032.59 -4040.65,-2060.33 -4040.65,-2091.76 -4211.01,-2091.76 -4235.79,-2116.54 -4235.79,-2170.43 -4240.94,-2175.59
AGND on Top Layer "AGND_L01_P074" (solid, remove dead copper, pour order 74): -4830.71,-1757.48 -4830.71,-2531.5 -5476.38,-2531.5 -5476.38,-1757.48
HV_IN on Top Layer "HV_IN_L01_P082" (solid, pour order 82): -6192.91,-456.69 -6192.91,-1074.8 -3244.09,-1074.8 -3244.09,-1578.74 -3007.87,-1578.74 -3007.87,-775.59 -5523.62,-775.59 -5523.62,-456.69
LVGND on Top Layer "LVGND_L01_P068" (solid, pour order 68): -885.83,-1870.08 -47.24,-1870.08 -47.24,-2661.42 -885.83,-2661.42
LVGND on Top Layer "LVGND_L01_P096" (solid, pour order 96): -1925.98,-947.16 -1501.57,-947.16 -1501.57,-1175.5 -1925.98,-1175.5
LVGND on Top Layer "LVGND_L01_P076" (solid, remove dead copper, pour order 76): -1263.78,-1984.25 -862.2,-1984.25 -862.2,-2988.36 -1263.78,-2988.36
HVGND on Top Layer "HVGND_L01_P104" (solid, pour order 104): -4606.3,-2598.43 -4606.3,-2751.55 -4051.18,-2751.55 -4051.18,-2598.43
Pri_Drain_SWP on Top Layer "Top Layer-Pri_Drain_SWP" (solid, pour order 26): -3797.24,-1811.02 -3797.24,-1901.57 -3889.76,-1994.09 -3889.76,-2322.83 -3952.76,-2385.83 -4346.46,-2385.83 -4346.46,-2519.69 -3248.03,-2519.69 -3035.43,-2307.09 -3035.43,-1811.02
+14V_OUT on Top Layer "+14V_OUT_L01_P066" (solid, pour order 66): -885.83,-779.53 -47.24,-779.53 -47.24,-1862.2 -885.83,-1862.2
Cch_Drain_CSW on Top Layer "CCH_DRAIN_CSW_L01_P070" (solid, pour order 70): -1929.13,-1572.59 -2029.77,-1572.59 -2326.77,-1572.59 -2326.77,-858.27 -2606.3,-858.27 -2606.3,-173.23 -47.24,-173.23 -47.24,-653.54 -1224.41,-653.54 -1224.41,-862.2 -1929.13,-862.2
Fwd_Drain_FSW on Top Layer "FWD_DRAIN_FSW_L01_P078" (solid, pour order 78): -2208.66,-1610.24 -2031.5,-1610.24 -2031.5,-1984.25 -1263.78,-1984.25 -1263.78,-2988.19 -2208.66,-2988.19
Clp_Drain on Top Layer "Top Layer-Clp_Drain" (solid, pour order 20): -3797.24,-1708.66 -3797.24,-1803.15 -3374.02,-1803.15 -3374.02,-1100.55 -3423.39,-1051.18 -3586.61,-1051.18 -3637.8,-1102.36 -3637.8,-1708.66
HV+ on Top Layer "HV+_L01_P060" (solid, pour order 60): -6638.58,-699.61 -6638.58,-1153.94 -6287.4,-1153.94 -6287.4,-699.61
VIN_F on Top Layer "VIN_F_L01_P058" (solid, pour order 58): -6638.58,-454.33 -6638.58,-668.11 -6220.08,-668.11 -6220.08,-453.15
LVGND on Bottom Layer "LVGND_L04_P094" (solid, pour order 94): -1267.72,-1987.31 -866.14,-1987.31 -866.14,-2991.42 -1267.72,-2991.42
LVGND on Bottom Layer "LVGND_L04_P086" (solid, pour order 86): -885.83,-1870.08 -47.24,-1870.08 -47.24,-2661.42 -885.83,-2661.42
Fwd_Drain_FSW on Bottom Layer "FWD_DRAIN_FSW_L04_P090" (solid, pour order 90): -2208.66,-1610.24 -2031.5,-1610.24 -2031.5,-1984.25 -1263.78,-1984.25 -1263.78,-2988.19 -2208.66,-2988.19
LVGND on Bottom Layer "LVGND_L04_P080" (solid, pour order 80): -1925.2,-944.88 -1500.79,-944.88 -1500.79,-1173.23 -1925.2,-1173.23
HV+ on Bottom Layer "HV+_L04_P106" (solid, pour order 106): -6638.58,-699.61 -6638.58,-1153.94 -6287.4,-1153.94 -6287.4,-699.61
HVGND on Bottom Layer "HVGND_L04_P102" (solid, pour order 102): -4606.3,-2598.43 -4606.3,-2751.55 -4051.18,-2751.55 -4051.18,-2598.43
Pri_Current_Sense on Bottom Layer "Bottom Layer-Pri_Current_Sense" (solid, remove dead copper, pour order 54): -4295.28,-2177.17 -4050,-2177.17 -4050,-2537.17 -4099.45,-2586.61 -4484.25,-2586.61 -4484.25,-2366.14
Pri_Drain_SWP on Bottom Layer "Top Layer-Pri_Drain_SWP" (solid, pour order 98): -3797.24,-1811.02 -3797.24,-1901.57 -3889.76,-1994.09 -3889.76,-2322.83 -3952.76,-2385.83 -4346.46,-2385.83 -4346.46,-2519.69 -3248.03,-2519.69 -3035.43,-2307.09 -3035.43,-1811.02
+14V_OUT on Bottom Layer "+14V_OUT_L04_P088" (solid, pour order 88): -886.15,-779.93 -47.57,-779.93 -47.57,-1862.61 -886.15,-1862.61
Cch_Drain_CSW on Bottom Layer "CCH_DRAIN_CSW_L04_P092" (solid, pour order 92): -1929.13,-1572.59 -2029.77,-1572.59 -2326.77,-1572.59 -2326.77,-858.27 -2606.3,-858.27 -2606.3,-173.23 -47.24,-173.23 -47.24,-653.54 -1224.41,-653.54 -1224.41,-862.2 -1929.13,-862.2
Cch_I_Sense on Bottom Layer "CCH_I_SENSE_L04_P072" (solid, pour order 72): -2547.24,-535.43 -1413.39,-535.43 -1413.39,-779.53 -1500.79,-779.53 -1500.79,-944.88 -1925.2,-944.88 -1925.2,-787.4 -2547.24,-787.4
HV_IN on Bottom Layer "HV_IN_L04_P084" (solid, pour order 84): -6192.91,-456.69 -6192.91,-1074.8 -3244.09,-1074.8 -3244.09,-1578.74 -3007.87,-1578.74 -3007.87,-775.59 -5523.62,-775.59 -5523.62,-456.69
HV_IN on Bottom Layer "HV_IN_L04_P064" (solid, pour order 64): -5692.91,-724.8 -5692.91,-1608.66 -5874.02,-1608.66 -5874.02,-724.8
HVGND on Bottom Layer "HVGND_L04_P062" (solid, pour order 62): -5874.02,-723.23 -5874.02,-1607.09 -6059.06,-1607.09 -6059.06,-723.23

## Text inside footprints (layer, text, board x,y; h text height)
C26: Top Overlay "+" at -5785.43,-1061.02 h78.74 r180
D5: Top Overlay "*" at -936.69,-1689.92 h60 r270
M2: Top Overlay "*" at -1196.85,-2610.24 h60 r90
T1: Top Overlay "*" at -5024.02,-1114.17 h157.48 r90
T2: Top Overlay "*" at -3338.91,-820.62 h157.48 r270
T3: Bottom Overlay "*" at -2944.88,-2687.54 h157.48 r180